# EAGLE board Node (EAGLE 9.5.2)
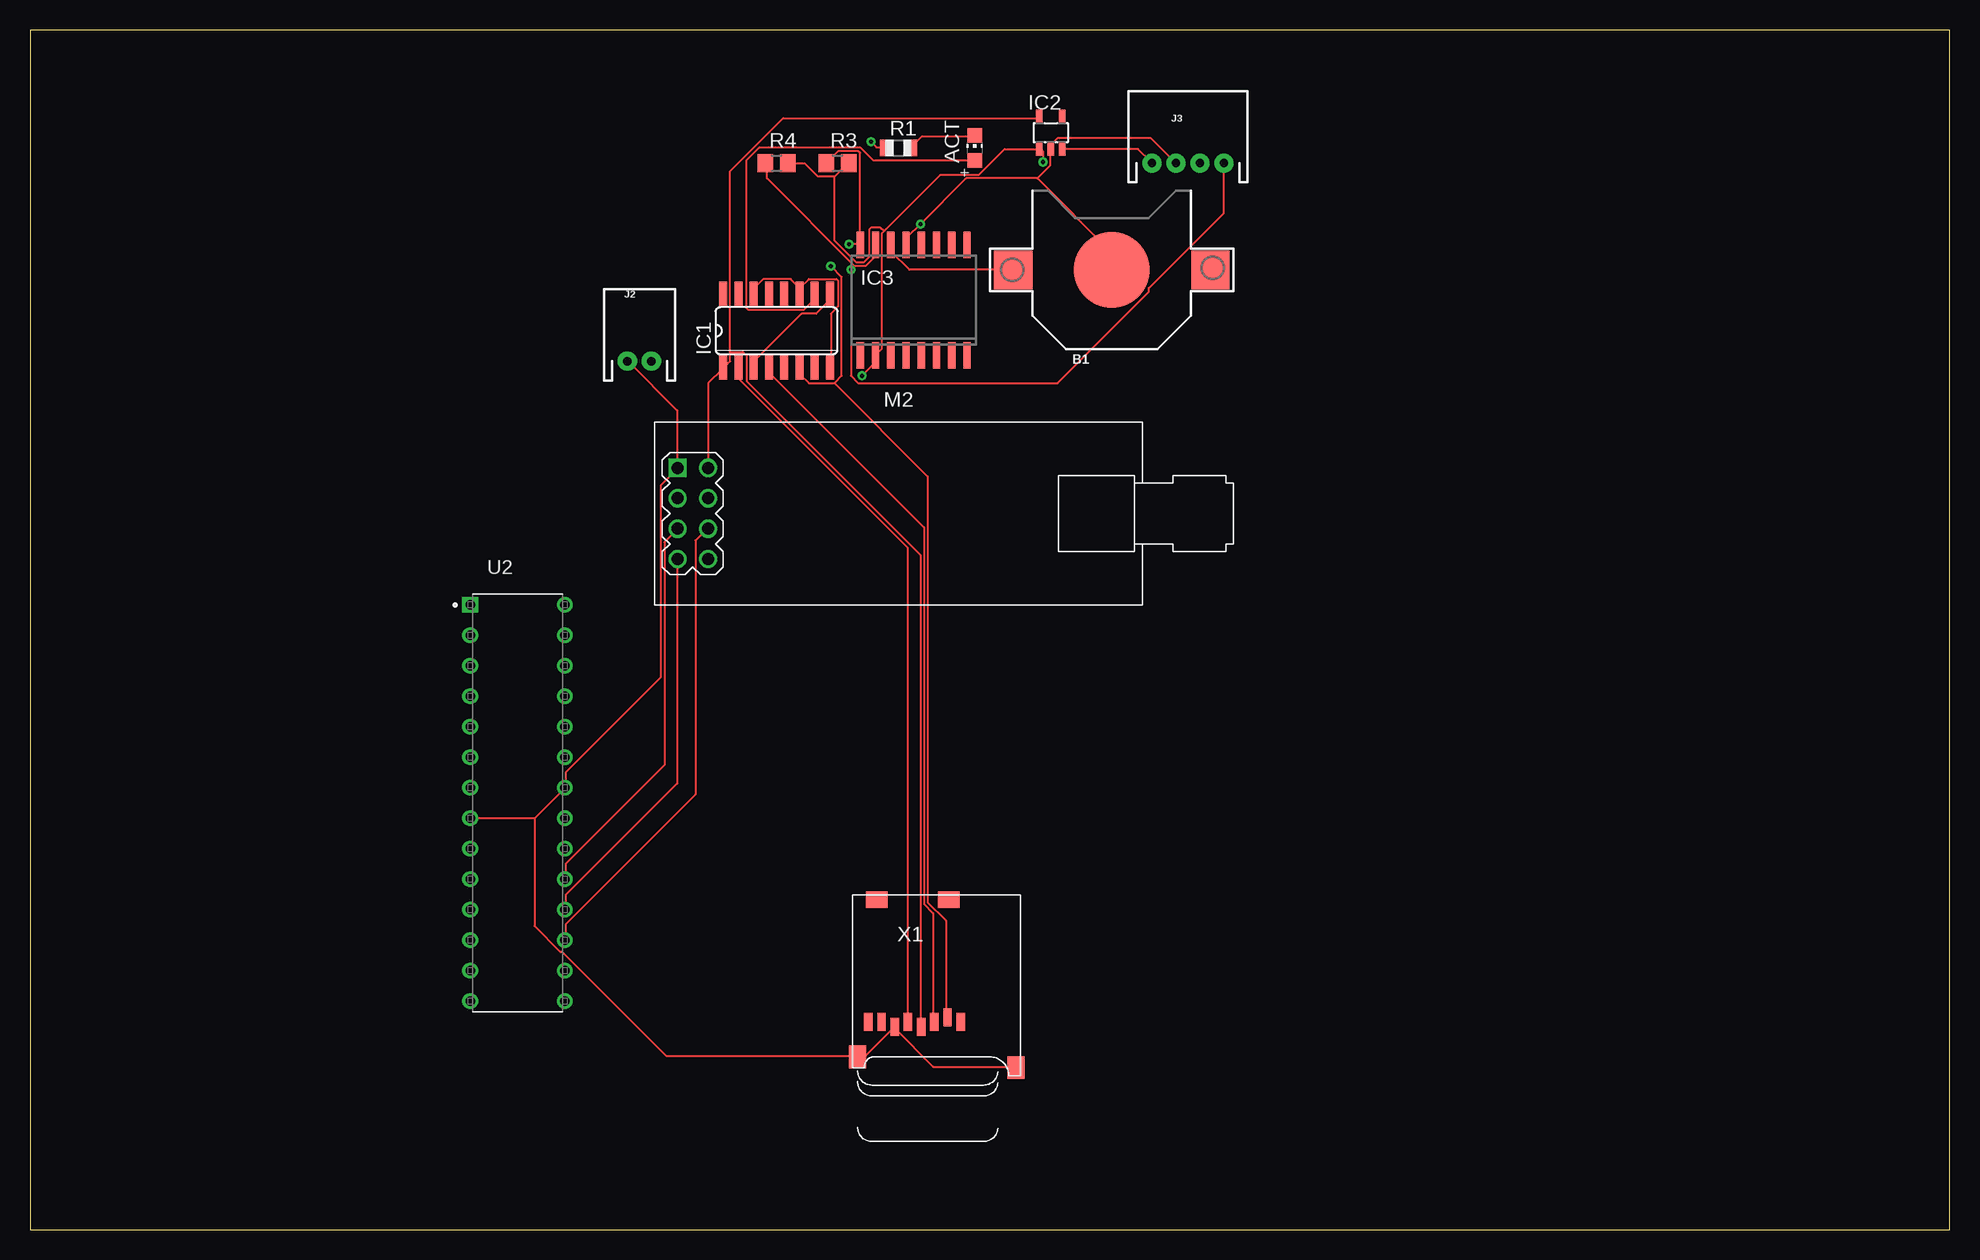
[diagram p0: board, top side]
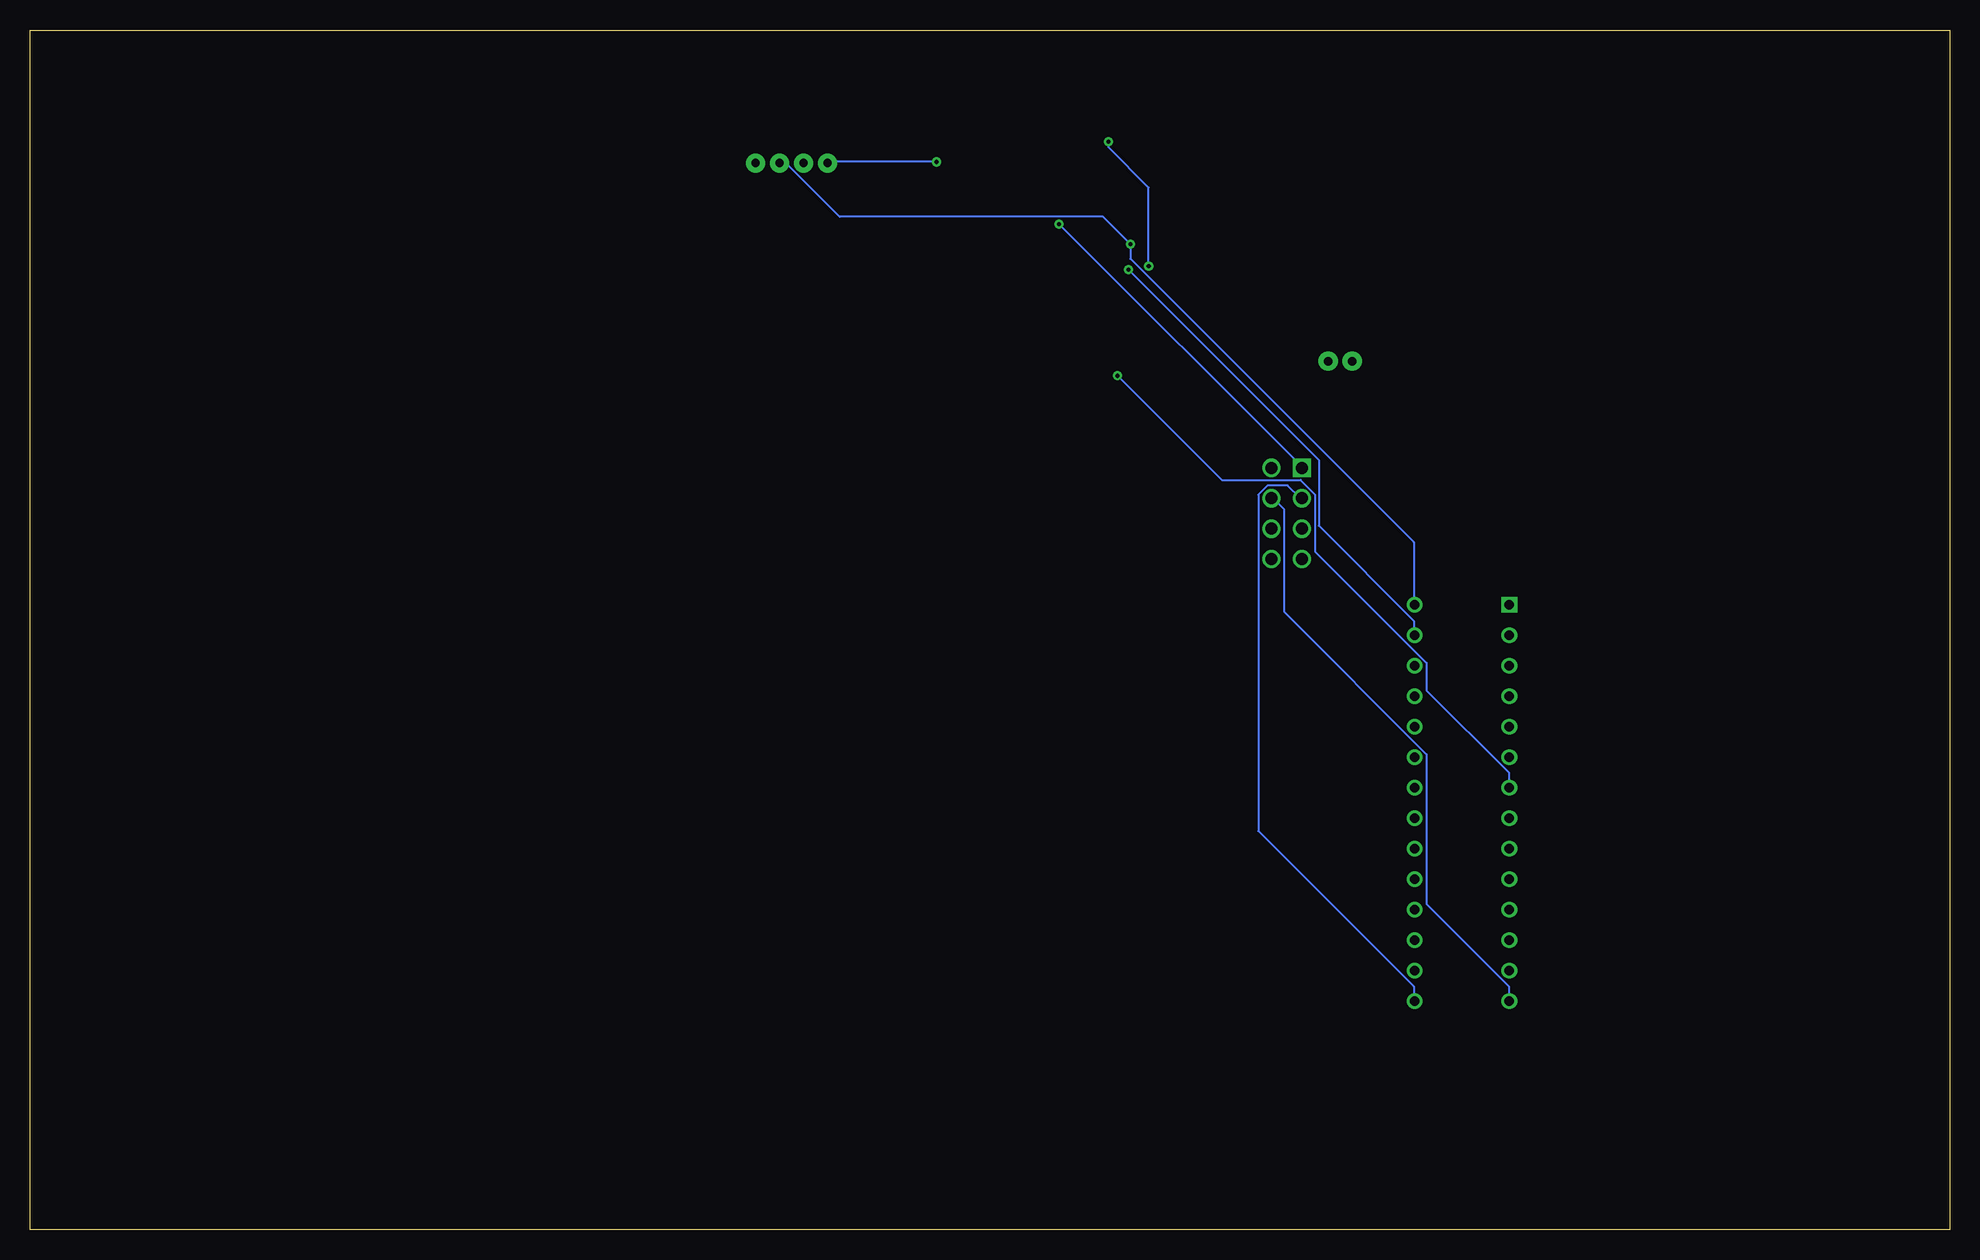
[diagram p1: board, bottom side, seen from below]

Size 160 x 100 mm. Coordinates in mm from the lower left corner, seen from the top.
Outline: 0,0 160,0 160,100 0,100 0,0
Copper layers (1*16): Top 0.035mm / dielectric 1.5mm / Bottom 0.035mm
Design rules "default": minimum track width 6mil, minimum drill 0.35mm, track to track 6mil, track to pad 6mil, pad to pad 6mil, via to via 6mil, smd to smd 6mil, copper to edge 40mil, drill to drill 6mil, minimum pad ring 10mil, minimum via ring 8mil, stop-mask expansion 4mil, vias tented up to drill 0mil, thermal gap 10mil

## Footprints (pad centres in the part's own frame; a part is rotated, then mirrored left to right if it is on the bottom)
CHIP-LED0805 = smd 1.2 x 1.2: A 0,-1.05; C 0,1.05
CR1220 = smd 3.2 x 3.2: +$1 -8.225,0; +$2 8.225,0 | smd 6.35 x 6.35: - 0,0
SO16 = smd 0.66 x 2.032: 1 -4.445,-3.073; 2 -3.175,-3.073; 3 -1.905,-3.073; 4 -0.635,-3.073; 5 0.635,-3.073; 6 1.905,-3.073; 7 3.175,-3.073; 8 4.445,-3.073; 9 4.445,3.073; 10 3.175,3.073; 11 1.905,3.073; 12 0.635,3.073; 13 -0.635,3.073; 14 -1.905,3.073; 15 -3.175,3.073; 16 -4.445,3.073
SOT23-5L = smd 0.55 x 1.2: 1 -0.95,-1.3; 2 0,-1.3; 3 0.95,-1.3; 4 0.95,1.3; 5 -0.95,1.3
SO16W = smd 0.6 x 2.2: 1 -4.445,-4.6; 2 -3.175,-4.6; 3 -1.905,-4.6; 4 -0.635,-4.6; 5 0.635,-4.6; 6 1.905,-4.6; 7 3.175,-4.6; 8 4.445,-4.6; 9 4.445,4.6; 10 3.175,4.6; 11 1.905,4.6; 12 0.635,4.6; 13 -0.635,4.6; 14 -1.905,4.6; 15 -3.175,4.6; 16 -4.445,4.6
JST-2-PTH = drill 0.7 pad 1.6: 1 -1,0; 2 1,0
JST-4-PTH = drill 0.7 pad 1.6: 1 -3,0; 2 -1,0; 3 1,0; 4 3,0
WIRELESS-NRF24L01-PA-EXT = drill 1 square: 1 -18.415,3.81 | drill 1: 2 -15.875,3.81; 3 -18.415,1.27; 4 -15.875,1.27; 5 -18.415,-1.27; 6 -15.875,-1.27; 7 -18.415,-3.81; 8 -15.875,-3.81
R0805 = smd 1.1 x 1.4: 1 -1,0; 2 1,0
R0805' = smd 1.3 x 1.5: 1 -0.95,0; 2 0.95,0
DIP-28 = drill 0.79 pad 1.19 square: 1 -3.95,16.51 | drill 0.79 pad 1.19: 2 -3.95,13.97; 3 -3.95,11.43; 4 -3.95,8.89; 5 -3.95,6.35; 6 -3.95,3.81; 7 -3.95,1.27; 8 -3.95,-1.27; 9 -3.95,-3.81; 10 -3.95,-6.35; 11 -3.95,-8.89; 12 -3.95,-11.43; 13 -3.95,-13.97; 14 -3.95,-16.51; 15 3.95,-16.51; 16 3.95,-13.97; 17 3.95,-11.43; 18 3.95,-8.89; 19 3.95,-6.35; 20 3.95,-3.81; 21 3.95,-1.27; 22 3.95,1.27; 23 3.95,3.81; 24 3.95,6.35; 25 3.95,8.89; 26 3.95,11.43; 27 3.95,13.97; 28 3.95,16.51
MICROSD = smd 0.7 x 1.5: 1 9,-10.64; 2 7.9,-10.24; 3 6.8,-10.64; 4 5.7,-11.04; 5 4.6,-10.64; 6 3.5,-11.04; 7 2.4,-10.64; 8 1.3,-10.64 | smd 1.8 x 1.4: CD1 2,-0.44; CD2 8,-0.44 | smd 1.4 x 1.9: MT1 0.4,-13.54; MT2 13.6,-14.44

## Placement (x,y rotation side)
ACT  RED  [CHIP-LED0805]  78.74,90.17 0 top
B1  CR1220  [CR1220]  90.17,80.01 0 top
IC1  4050D  [SO16]  62.23,74.93 0 top
IC2  LP298XS  [SOT23-5L]  85.09,91.44 0 top
IC3  DS3231/SO  [SO16W]  73.66,77.47 0 top
J2  [JST-2-PTH]  50.8,72.39 0 top
J3  [JST-4-PTH]  96.52,88.9 0 top
M2  WIRELESS-NRF24L01-PA-EXT  [WIRELESS-NRF24L01-PA-EXT]  72.39,59.69 0 top
R1  1K  [R0805]  72.39,90.17 0 top
R3  [R0805']  67.31,88.9 0 top
R4  [R0805']  62.23,88.9 0 top
U2  ATMEGA328P-PU  [DIP-28]  40.64,35.56 0 top
X1  MICROSD  [MICROSD]  68.58,27.94 0 top

## Library data of the parts
ACT IC2 IC3 R1 X1 = adafruit
B1 = microbuilder
IC1 = 40xx
J2 = SparkFun-Connectors; PROD_ID: CONN-09863; SKU: PRT-09914
J3 = SparkFun-Connectors; PROD_ID: WIRE-13531; SF_ID: PRT-09916
M2 = diy-modules
R3 R4 = rcl; SPICEPREFIX: R
U2 = Microcontroller; CREATED_BY: PCBLayout.com; DIGIKEY_PART_NUMBER: ATMEGA328P-PU-ND; MANUFACTURER: Microchip Technology; MPN: ATMEGA328P-PU; PACKAGE: DIP-28

## Nets
32KHZ: IC3.1
!RTC_RST: IC3.4
+3V3: IC1.1 IC2.5 M2.2 X1.4
+5V: IC2.1 IC2.3 IC3.2 J3.1 R3.2 R4.2 U2.7
AVCC: U2.20
CD: X1.CD1
CE: M2.3 U2.15
CLK: IC1.3 IC1.9
CS: IC1.7
CSN: M2.4 U2.14
DI: IC1.5
DO: X1.7
GND: B1.- IC2.2 IC3.13 J2.1 J3.2 M2.1 U2.8 U2.22 X1.6 X1.MT1 X1.MT2
GND_SD: IC1.8 IC1.11 IC1.14
MISO: M2.7 U2.18
MOSI: M2.6 U2.17
N$1: ACT.A IC1.10
N$2: IC1.2 X1.5
N$3: IC1.6 R1.1 X1.2
N$4: ACT.C R1.2
N$5: IC1.4 X1.3
SCK: M2.5 U2.19
SCL: IC3.16 J3.3 R3.1 U2.28
SDA: IC3.15 J3.4 R4.1 U2.27
SQW: IC3.3
V_EXTERNAL_BATTERY: J2.2
VBAT: B1.+$1 IC3.14

## Tracks (layer width: path | path; a pad name or v marks a point on that pad's centre or on a via)
+3V3
  Top 0.152: 58.37,73.15 58.37,72.39 57.91,71.93 IC1.1 57.76,71.78 56.54,70.56 56.54,63.55 M2.2 | 58.37,73.15 58.37,88.24 62.79,92.66 84.12,92.66 IC2.5 | 58.37,73.15 59.44,73.15 59.74,72.85 59.74,70.71 74.22,56.24 74.22,16.92 X1.4
+5V  (via drill 0.35)
  Top 0.152: IC2.3 86.11,90.07 92.35,90.07 93.42,89 J3.1 | 67.06,87.78 65.68,87.78 64.62,88.85 63.25,88.85 R4.2 | 67.06,87.78 68.12,88.85 R3.2 | 71.17,83.21 71.02,83.06 71.02,73.46 70.56,73 IC3.2 70.41,72.85 70.41,72.24 v69.34,71.17 | 71.17,83.21 75.89,87.94 79.1,87.94 81.23,90.07 84.12,90.07 IC2.1 84.28,90.07 84.43,89.92 v84.43,89 | 67.06,87.78 67.06,82.45 68.89,80.62 69.49,80.62 69.95,81.08 69.95,83.36 70.1,83.52 70.87,83.52 71.17,83.21
  Bottom 0.152: v69.34,71.17 60.66,62.48 54.1,62.48 52.88,61.27 52.88,56.54 43.59,47.24 43.59,44.96 36.73,38.1 36.73,36.88 U2.7 | v84.43,89 93.42,89 J3.1
CE
  Bottom 0.152: U2.15 44.65,19.05 44.65,20.27 57.61,33.22 57.61,61.27 56.84,62.03 55.17,62.03 54.1,60.96 M2.3
CLK
  Top 0.152: IC1.3 60.35,71.93 60.35,72.39 64.31,76.35 65.53,76.35 66.6,77.42 66.6,77.88 IC1.9
CSN
  Bottom 0.152: U2.14 36.73,19.05 36.73,20.27 43.59,27.13 43.59,39.62 55.47,51.51 55.47,60.05 56.39,60.96 M2.4
GND  (via drill 0.35)
  Top 0.152: J3.2 95.4,89 93.42,90.98 85.65,90.98 85.19,90.53 85.19,90.22 IC2.2 85.04,90.07 85.04,88.7 83.97,87.63 | 83.97,87.63 78.03,87.63 v74.22,83.82 73.15,82.75 73.15,82.14 IC3.13 | 83.97,87.63 90.07,81.53 90.07,80.01 B1.- | X1.MT2 82.14,13.56 75.29,13.56 72.08,16.76 X1.6 71.93,16.76 69.65,14.48 69.04,14.48 X1.MT1 68.89,14.48 53.03,14.48 44.35,23.16 44.2,23.16 42.06,25.3 42.06,34.29 | 42.06,34.29 U2.8 | 42.06,34.29 44.5,36.73 U2.22 44.65,36.88 44.65,38.1 52.58,46.02 52.58,62.03 53.95,63.4 M2.1 53.95,63.55 53.95,68.28 49.84,72.39 J2.1
  Bottom 0.152: v74.22,83.82 53.95,63.55 M2.1
GND_SD
  Top 0.152: 64.16,78.49 64.92,79.25 67.21,79.25 67.36,79.1 67.36,76.96 66.75,76.35 66.75,71.93 IC1.8 | 64.16,78.49 64.16,78.03 IC1.11 64.16,78.49 | 64.16,78.49 63.4,79.25 61.11,79.25 60.35,78.49 60.35,78.03 IC1.14
MISO
  Top 0.152: U2.18 44.65,26.67 44.65,27.89 53.95,37.19 53.95,55.78 M2.7
MOSI
  Top 0.152: U2.17 44.65,24.23 44.65,25.45 55.47,36.27 55.47,57.45 56.39,58.37 M2.6
N$1
  Top 0.152: ACT.A 78.64,89.15 70.26,89.15 69.19,90.22 60.81,90.22 59.74,89.15 59.74,76.81 59.89,76.66 64.47,76.66 65.38,77.57 65.38,77.88 IC1.10
N$2
  Top 0.152: X1.5 73.15,17.37 73.15,56.84 59.13,70.87 59.13,71.78 IC1.2
N$3  (via drill 0.35)
  Top 0.152: v70.1,90.68 70.56,90.22 71.32,90.22 R1.1 | v66.75,80.31 67.67,79.4 67.67,71.17 67.06,70.56 | 67.06,70.56 64.92,70.56 64.16,71.32 64.16,71.78 IC1.6 | 67.06,70.56 74.83,62.79 74.83,27.28 76.35,25.76 76.35,17.83 X1.2
  Bottom 0.152: v70.1,90.68 70.1,90.22 66.75,86.87 v66.75,80.31
N$4
  Top 0.152: ACT.C 78.64,91.14 74.37,91.14 73.46,90.22 R1.2
N$5
  Top 0.152: X1.3 75.29,17.37 75.29,26.36 74.52,27.13 74.52,58.52 61.72,71.32 61.72,71.78 IC1.4
SCK
  Top 0.152: U2.19 44.65,29.26 44.65,30.48 52.88,38.71 52.88,57.3 53.95,58.37 M2.5
SCL  (via drill 0.35)
  Top 0.152: 69.19,82.14 69.19,89.76 69.04,89.92 67.36,89.92 66.45,89 R3.1 | 69.19,82.14 v68.28,82.14 | 69.19,82.14 IC3.16
  Bottom 0.152: U2.28 44.65,52.12 44.65,57.3 68.28,80.92 v68.28,82.14 70.56,84.43 92.51,84.43 96.93,88.85 97.38,88.85 J3.3
SDA  (via drill 0.35)
  Top 0.152: 68.73,80.31 61.42,87.63 61.42,88.85 R4.1 | 68.73,80.31 69.65,80.31 70.41,81.08 70.41,81.99 IC3.15 | 68.73,80.31 v68.43,80.01 68.43,71.17 69.04,70.56 85.65,70.56 93.27,78.18 93.27,78.49 99.52,84.73 99.52,88.85 J3.4
  Bottom 0.152: v68.43,80.01 52.58,64.16 52.58,58.67 44.65,50.75 44.65,49.53 U2.27
VBAT
  Top 0.152: B1.+$1 73.3,80.01 71.78,81.53 71.78,81.99 IC3.14